# Altium PCB CH32F207&V307V-R3-2v0.PcbDoc (part 2 of 2)
Units mil, origin at the board's own origin, x right, y up, seen from the top; angles counter-clockwise.
Board outline 2913.39 x 3937.01 mil, 2 copper layers (Top Layer, Bottom Layer); 74 components, 114 nets, 419 pads, 786 vias.
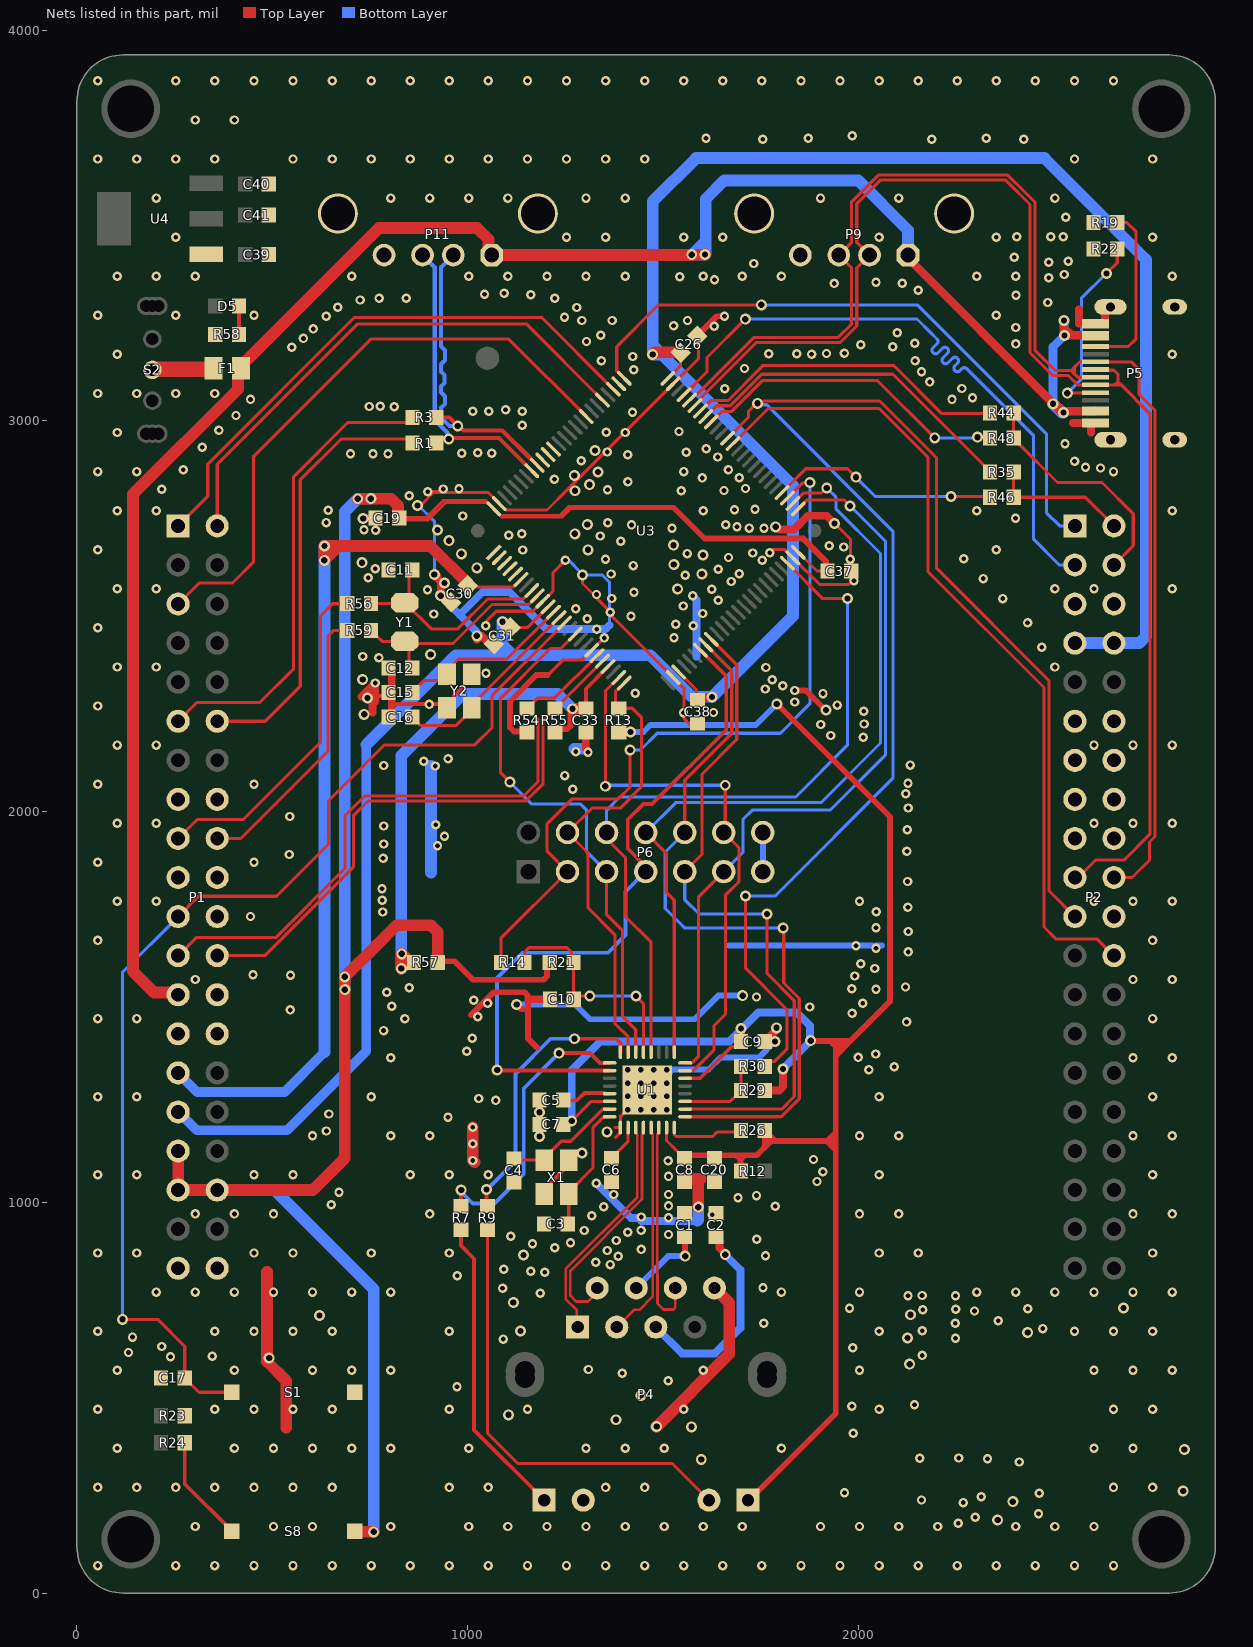
[diagram p2: the nets of this part, all layers, seen from the top]

## Via types
v1: diameter 24, hole 12, Top Layer to Bottom Layer, tented both sides, 649 vias
v2: diameter 28, hole 16, Top Layer to Bottom Layer, tented both sides, 129 vias
v3: diameter 20, hole 14, Top Layer to Bottom Layer, tented both sides, 8 vias

## Nets (pads, with @x,y where several pads share a name; then routed paths per layer and width w, separated by ;. In a path a pad name is that pad's centre, name@x,y a point inside that pad or via, vN(x,y) a via of type N, cw(c..) or ccw(c..) an arc to the next point about the centre after c; other vN are vias at no path point) (continued)
GND: C1.1 C2.1 C3.1 C4.1 C5.1 C6.1 C7.1 C8.1 C9.1 C10.1 C11.1 C12.1 C15.1 C16.1 C17.1 C19.2 C20.1 C26.1 C30.1 C31.2 C33.2 C37.1 C38.1 C39.2 C40.2 C41.2 P1.15 P1.16 P1.19 P1.20 P1.22 P1.26 P1.27 P1.28 P1.39 P1.40 P2.5 P2.6 P2.11 P2.12 P2.13 P2.14 P2.15 P2.16 P2.17 P2.18 P2.22 P4.8 P4.10 P5.0 P5.A1 P5.B1 P6.13 P6.14 P9.0 P9.4 P11.0 P11.4 R19.2 R22.2 R23.2 R54.1 R58.1 S1.1 U1.0 U1.1 U3.10 U3.19 U3.27 U3.49 U3.74 U3.99 U4.1 X1.2 X1.4 Y2.2 Y2.4 | length 9052.2
  Top Layer w8: v2(871.79,2783.87) 879.92,2783.87 912.86,2816.81 946.5,2816.81 ; v1(897.63,2819.23) 930.58,2819.23 v1(937.33,2825.98) 946.5,2816.81 ; 1049.19,2488.87 1073.34,2513.02 1166.83,2513.02 U3.10@1192.22,2538.42 1192.49,2538.42 1218.52,2564.44 1218.52,2611.77 v1(1250.36,2643.6) ; 1205.11,2349.62 1243.45,2387.96 1292.31,2387.96 U3.19@1317.5,2413.14 v1@1341.82,2437.46 ; v2(1294.07,2605.56) 1294.07,2584.06 1326.07,2552.07 1329.7,2552.07 1333.11,2548.65 1333.11,2543.66 1365.12,2511.65 v1(1365.12,2510.84) ; v1@1368.18,2503.45 1368.18,2501.66 U3.27@1526.29,2343.55 1553.46,2316.37 1553.46,2239.01 1569.2,2223.28 C38.1@1594.99,2223.28 ; 1377.69,1191.56 U1.1@1391.13,1191.56 ; 1379.23,1166.65 1391.13,1178.56 U1.1@1391.13,1191.56 ; U1.0@1460.02,1288.04 1391.13,1219.15 U1.1@1391.13,1191.56 ; C26.1@1590.81,3214.89 1588.61,3212.69 1588.61,3196.86 1590.81,3194.66 1590.81,3159.71 U3.74@1526.29,3095.19 1364.7,2933.6 1256.28,2825.18 1203.13,2772.03 1098.07,2772.03 1081.14,2788.97 U3.99@1080.87,2788.97 1053.03,2816.81 946.5,2816.81 ; v1@1781.77,2670.87 1811.42,2670.87 U3.49@1832.52,2649.77 1900.57,2581.72 1975.15,2581.72 1979.84,2586.41 1979.84,2696.96 v2(1939.28,2737.52)
  Top Layer w10: 763.65,2295.95 763.83,2295.77 C15.1@805.65,2295.77 ; 805.65,2275.22 937.86,2275.22 Y2.2@947.43,2265.64 ; Y2.2@953.93,2277.07 965.07,2288.2 965.07,2297.16 992.79,2324.88 992.79,2333.7 Y2.4@1015.13,2356.04 ; X1.2@1195.81,1021.52 1213.45,1039.16 1213.45,1051.05 X1.4@1259.17,1096.78
  Top Layer w15: 1008.28,1479.25 1066.73,1537.7 1146.14,1537.7 1153.52,1530.32 1153.52,1515.31 1155.47,1513.37 ; v2(1125.64,1506.56) 1137.69,1494.5 1154.93,1494.5 ; R54.1@1151.71,2203.39 1149.86,2205.24 1118.94,2205.24 1108.4,2215.79 1108.4,2282.23 1175.79,2349.62 1205.11,2349.62 ; 1154.93,1512.83 1154.93,1494.5 ; 1178.23,1395.81 1154.93,1419.11 1154.93,1494.5 ; C26.1@1587.91,3217.79 1638.04,3267.92 v1(1657.57,3267.92) ; v1(1837.58,2310.24) 1865.73,2310.24 1915.89,2260.08 v2(1917.56,2260.08)
  Top Layer w20: 728.37,2294.25 v1(763.65,2329.53) 763.65,2295.95 763.65,2282.1 756.34,2274.79 756.34,2254.28 ; v2(732.81,2750.69) 733.22,2751.1 764.01,2751.1 C19.2@764.42,2751.51 ; C16.1@805.65,2259.28 805.65,2275.22 805.65,2295.77 C12.1@805.65,2367.29 ; v2@922.84,2602.41 920.67,2600.24 920.67,2598.71 931.08,2588.3 v2(931.08,2552.96) 942.37,2552.96 958.04,2537.29 C30.1@958.04,2536.05 ; v2(1023.58,2450.1) 1023.58,2440.91 1024.25,2440.24 1034.86,2450.85 1056.71,2429 C31.2@1066.98,2429 ; 1166.48,1519.95 C10.1@1210.77,1519.95 ; C33.2@1302.56,2203.39 1302.56,2161.93 v1@1305.67,2158.82 ; C9.1@1760.6,1411.72 1760.6,1412.71 1768.9,1421.01 1769.89,1421.01 1790.67,1441.8 v2(1790.67,1446.77) ; v2(1788.61,2729.1) 1790.78,2729.1 1797.76,2722.11 1835.38,2722.11 1870.67,2757.4 1919.4,2757.4 v2(1939.28,2737.52) ; 2549.01,2994.92 P5.A1@2595.58,2994.92 ; 2564.59,3286.19 2564.59,3248.85 P5.B1@2607.08,3248.85 2629.71,3248.85 2631.53,3250.66 2631.53,3283.02 2640.47,3291.96 P5.0@2645.27,3291.96 ; 2595.58,2970.49 P5.A1@2595.58,2994.92 ; P5.A1@2607.08,2994.92 P5.A1@2595.58,2994.92
  Top Layer w30: 486.66,822.84 486.66,592.85 535.99,543.52 535.99,423.35 ; v1(1013.13,1192.39) v1(1013.13,1149.81) v1(1013.13,1107.24) v1@1017.7,1102.68 ; v2(1483.88,426.33) 1669.75,612.19 1669.75,742.85 P4.8@1631.72,780.88 ; C8.1@1554.17,1059.9 1596.54,1059.9 1590.61,1053.97 v2(1590.61,987.87)
  Bottom Layer w8: v2(871.79,2783.87) 874.19,2783.87 914.82,2743.23 v2(914.82,2607.28) ; v1(1250.36,2643.6) 1258.68,2643.6 v2@1290.29,2611.99 ; v2(1294.07,2605.56) 1345.4,2605.56 1362.9,2588.06 1362.9,2477.28
  Bottom Layer w15: v2(1125.64,1506.56) 1275.43,1506.56 1313.19,1468.8 1581.35,1468.8 1641.71,1529.16 v2(1704.12,1529.16) ; 1514.26,1329.2 1525.08,1340.01 1616.45,1340.01 1647.77,1371.33 1746.35,1371.33 v2(1786.74,1411.72) ; 1669.06,1657.14 2036.07,1657.14 2041.01,1652.2 2042.73,1652.2 v1@2045.16,1654.64 ; P6.13@1755.72,1846.68 P6.14@1755.72,1946.68 ; v1@2045.16,1657.14 2060.76,1657.14
  Bottom Layer w20: v2@926.94,2556.61 979.82,2503.73 ; v2(1023.58,2450.1) 1023.58,2459.96 979.82,2503.73 ; v1(1329.67,1048.76) 1418.6,959.84 1440.58,959.84 1442.58,961.85 1443.35,961.85 v1@1444.43,960.76 ; 1362.9,2477.28 1353.26,2467.65 1201.38,2467.65 1106.42,2562.61 1038.7,2562.61 979.82,2503.73 ; v1@1444.43,952.76 1588.27,952.76 ; v1(1576,2552.62) 1576,2551.54 1585.73,2541.8 1585.73,2396.63
  Bottom Layer w30: 906.22,1844.26 v1@906.22,2116.82 ; v1@1273.13,2160.92 1295.46,2160.92 ; U1.0@1476.73,1271.34 U1.0@1479.94,1274.55 ; v2@1483.59,426.03 v2(1483.88,426.33) ; 1588.27,952.76 1590.61,955.09 v2(1590.61,987.87)
  other v1: 53.19,70.49 253.19,70.49 353.19,70.49 453.19,70.49 553.19,70.49 653.19,70.49 753.19,70.49 853.19,70.49 953.19,70.49 1053.19,70.49 1153.19,70.49 1253.19,70.49 1353.19,70.49 1453.19,70.49 1553.19,70.49 1653.19,70.49 1753.19,70.49 1853.19,70.49 1953.19,70.49 2053.19,70.49 2153.19,70.49 2253.19,70.49 2353.19,70.49 2453.19,70.49 2553.19,70.49 2653.19,70.49 303.19,170.49 503.19,170.49 603.19,170.49 803.19,170.49 1003.19,170.49 1103.19,170.49 1203.19,170.49 1303.19,170.49 1403.19,170.49 1503.19,170.49 1603.19,170.49 1703.19,170.49 1903.19,170.49 2003.19,170.49 2103.19,170.49 2203.19,170.49 2403.19,170.49 2503.19,170.49 2603.19,170.49 2255.97,178.62 2299.6,194.55 2461.09,203.37 2268.5,231.68 2161.76,238.2 2314.52,246.92 2463.23,255.75 1964.55,257.06 53.19,270.49 153.19,270.49 253.19,270.49 353.19,270.49 453.19,270.49 553.19,270.49 653.19,270.49 953.19,270.49 1053.19,270.49 1353.19,270.49 1453.19,270.49 2653.19,270.49 2753.19,270.49 2411.64,335.63 2156.91,344.8 2330.8,344.05 2257.25,345.73 103.19,370.49 403.19,370.49 503.19,370.49 603.19,370.49 703.19,370.49 803.19,370.49 1003.19,370.49 1303.19,370.49 1403.19,370.49 1503.19,370.49 1803.19,370.49 2603.19,370.49 2703.19,370.49 1986.85,409.14 53.19,470.49 353.19,470.49 453.19,470.49 553.19,470.49 653.19,470.49 953.19,470.49 1153.19,470.49 1553.19,470.49 2053.19,470.49 2653.19,470.49 2753.19,470.49 1983.62,478.52 2143.72,481.8 972.81,528.2 1513.17,543.54 1395.68,562.94 103.19,570.49 403.19,570.49 603.19,570.49 703.19,570.49 803.19,570.49 1603.19,570.49 2003.19,570.49 2603.19,570.49 2703.19,570.49 2803.19,570.49 1309.23,572.36 239.64,605.15 346.81,606.34 2163.72,608.33 132.05,615.81 1985.41,628.3 217.08,631.35 1091.21,650.21 2248.83,652.26 142.46,655.28 53.19,670.49 353.19,670.49 453.19,670.49 553.19,670.49 653.19,670.49 953.19,670.49 2053.19,670.49 2553.19,670.49 2653.19,670.49 2753.19,670.49 2163.72,671.6 2472.02,677.09 2248.16,690.53 1757.93,691.06 2358.47,696.71 2297.32,721.91 2165.18,725.48 2249.35,726.47 1977.37,728.71 2433.43,728.1 2127.2,761.19 2163.2,761.62 2248.85,761.13 1185.61,767.28 203.19,770.49 303.19,770.49 403.19,770.49 503.19,770.49 603.19,770.49 703.19,770.49 803.19,770.49 1803.19,770.49 2003.19,770.49 2303.19,770.49 2403.19,770.49 2503.19,770.49 2603.19,770.49 2703.19,770.49 2803.19,770.49 1089.51,780.38 1756.08,781.95 973.86,812.61 1197.31,821.43 1161.46,823.63 1092.16,828.75 1365.08,840.83 1328.22,846.92 1385.36,861.8 1762.58,863.27 53.19,870.49 153.19,870.49 453.19,870.49 553.19,870.49 753.19,870.49 953.19,870.49 2053.19,870.49 2153.19,870.49 2753.19,870.49 1357.3,877.01 1444.32,879.65 1222.87,883.73 1166.21,894.06 1263.46,896.92 1380.27,902.49 1739.81,905.55 1110.79,913.01 1514.14,917.92 1410.1,923.26 1298.86,928.02 1444.02,928.4 1514.14,960.52 1444.43,962.61 1317.78,965.52 1625.97,968.44 303.19,970.49 403.19,970.49 503.19,970.49 903.19,970.49 2003.19,970.49 2103.19,970.49 2703.19,970.49 2803.19,970.49 1348.63,988.71 1514.14,990.95 1787.52,990.13 651.19,994.32 1692.11,1011.81 1739.33,1017.46 1374.04,1020.14 1514.14,1020.34 670.88,1025.91 1894.43,1053.54 1514.14,1066.49 53.19,1070.49 153.19,1070.49 453.19,1070.49 553.19,1070.49 853.19,1070.49 953.19,1070.49 1053.19,1070.49 2053.19,1070.49 2753.19,1070.49 1909.45,1078.37 1513.14,1106.62 1885.23,1109.83 603.19,1170.49 803.19,1170.49 903.19,1170.49 2003.19,1170.49 2103.19,1170.49 2703.19,1170.49 2803.19,1170.49 638.69,1182.79 949.96,1217.92 645.08,1226.24 1072.24,1261.04 1028.56,1265.84 53.19,1270.49 153.19,1270.49 753.19,1270.49 2053.19,1270.49 2753.19,1270.49 2027.21,1339.4 2091.87,1347.48 803.19,1370.49 2703.19,1370.49 2803.19,1370.49 2000.2,1371.07 2044.44,1379.91 997.86,1387.13 1011.56,1420.1 785,1439.82 2123.54,1461.93 53.19,1470.49 153.19,1470.49 839.59,1470.12 2753.19,1470.49 1026.26,1475.07 1984.06,1483.95 546.15,1492.64 1875.53,1500.03 806.15,1502.42 2011.2,1509.79 1051.11,1510.07 1016.11,1517.68 1739.46,1525.84 793,1537.86 2045.16,1545.57 1983.2,1546.46 850.74,1549.01 2120.79,1551.38 303.19,1570.49 2703.19,1570.49 2803.19,1570.49 1990.6,1579.4 546.66,1581.34 450.9,1582.85 2041.87,1598.59 2006.35,1610.46 2127.83,1641.12 2045.16,1650.48 1994.02,1656.54 53.19,1670.49 2753.19,1670.49 2127.83,1693.24 2045.16,1702.94 444.28,1731.6 783.17,1743.38 2046.23,1744 2126.98,1755.61 103.19,1770.49 203.19,1770.49 2003.19,1770.49 2603.19,1770.49 2703.19,1770.49 2803.19,1770.49 781.68,1773.58 780.88,1802.68 2126.12,1821.4 53.19,1870.49 453.19,1870.49 783.67,1880.68 543.42,1890.33 2124.41,1899.15 922.86,1912.45 785.16,1917.18 940.96,1937.15 2125.27,1953.84 785.63,1963.53 918.48,1966.8 103.19,1970.49 203.19,1970.49 2603.19,1970.49 2703.19,1970.49 2803.19,1970.49 544.54,1987.6 2128.04,2009.37 2121.46,2045.58 1268.79,2057.08 53.19,2070.49 453.19,2070.49 2127.05,2072.45 1248.29,2092.43 917.13,2116.82 785.63,2118.38 2132.65,2119.32 887.78,2128.8 950.03,2135.14 1308.06,2151.76 1276.48,2153.87 103.19,2170.49 203.19,2170.49 2603.19,2170.49 2703.19,2170.49 2803.19,2170.49 2012.82,2190.29 1929.77,2194.96 1903.97,2223.21 2014.79,2224.44 1552.55,2253.47 1629.43,2253.95 2013.81,2256.88 53.19,2270.49 1945.99,2272.85 901.63,2274.55 1837.47,2280.65 1909.63,2302.34 1429.01,2303.11 1761.68,2313.91 1806.92,2322.2 1779.98,2337.81 1047.06,2354.49 1763.55,2368.93 103.19,2370.49 203.19,2370.49 2503.19,2370.49 773.08,2393.63 731.34,2397.08 2469.43,2421.25 1350.11,2444.72 1528.37,2445.09 1330.81,2467.08 53.19,2470.49 1046.78,2475.93 1577.88,2475.77 1532.99,2479.44 2433.24,2483.66 1306.38,2493.79 1418.07,2500.57 913.64,2506.14 1601.84,2507.42 1277.2,2519.28 1552.11,2526.4 1641.62,2540.87 1369.19,2545.61 2369.58,2545.44 1330.05,2556.04 1426,2561.33 897.35,2567.79 1624.58,2569.34 103.19,2570.49 203.19,2570.49 2503.19,2570.49 2603.19,2570.49 2803.19,2570.49 1674.63,2589.25 1988.86,2591.41 2319.65,2596.62 745.91,2598.67 1557.08,2605.07 1367.22,2608.23 1695.46,2608.89 1641.17,2620.44 763.98,2622.17 1424.26,2629.95 1753.92,2643.28 1353.09,2646.43 1979.49,2646.35 2269.73,2647.17 1667.73,2650.5 1562.32,2660.66 1730,2662.18 1773.53,2663.13 1141.51,2669.72 53.19,2670.49 2353.19,2670.49 1962.39,2677.51 1925.49,2680.49 1392.22,2692.05 1339.52,2705.63 1105.71,2707.17 1138.86,2711.09 764.51,2720.4 734.94,2721.5 1523,2725.44 1720.7,2725.87 1758.52,2725.46 1689.67,2729.44 1419.55,2734.02 1660.41,2734.44 1358.49,2739.47 638.21,2740.01 2402.39,2751.15 987.79,2756.67 103.19,2770.49 203.19,2770.49 1603.19,2770.49 2303.19,2770.49 2803.19,2770.49 643.06,2771.36 1683.07,2772.79 1735.65,2774.1 850.69,2808.53 1547.04,2821.42 1656.13,2822.08 1357.92,2824.03 217.1,2825.28 978.09,2826.22 1711.24,2827.35 1410.35,2844.42 1222.26,2851.26 1600.93,2854.28 1695.27,2855.04 53.19,2870.49 153.19,2870.49 1553.19,2870.49 2653.19,2870.49 1667.58,2874.92 271.94,2875.09 2619.77,2879.64 2581.39,2881.36 2553.55,2896.82 1290.59,2898.32 1640.6,2907.93 1409.69,2913.42 700.2,2916.09 758.02,2916.09 796.25,2916.09 985.41,2917.15 1061.79,2917.16 1025.8,2918.61 1357.22,2920.57 1559.53,2920 1611.14,2928.88 320.74,2932.94 2529.02,2941.78 103.19,2970.49 1403.19,2970.49 1354.68,2971.37 1541.13,2973.23 363.5,2976.2 1140.23,2988.97 407.26,3013.93 1422.18,3022.51 1054.52,3024.7 1012.87,3025.05 1139.7,3025.24 1097.23,3028.62 812.11,3036.82 748.29,3037.19 776.21,3037.91 444.49,3055.19 2239.84,3055.19 2292.15,3059.21 53.19,3070.49 153.19,3070.49 253.19,3070.49 353.19,3070.49 1658.5,3082.49 2265.21,3083.22 2183,3099.96 2161.87,3126.12 1425.53,3131.37 1708.71,3134.49 2145.34,3153.8 1342.53,3154.5 1422.48,3164.92 103.19,3170.49 1880.39,3170.94 2803.19,3170.49 1770.91,3172.03 1842.26,3172.43 1918.52,3172.8 1964.5,3173.18 549.84,3188.51 2087.87,3189.92 2006.36,3194.86 2403.2,3197.26 2144.7,3198.7 1304.42,3203.5 579.76,3211.33 1340.72,3219.83 2100.07,3226.04 605.12,3235.67 2402.6,3239.34 1631.65,3242.53 1527.16,3243.52 1292.63,3257.03 1369.76,3257.03 1562.9,3257.3 1248.16,3265.2 638.59,3268.13 53.19,3270.49 253.19,3270.49 453.19,3270.49 2353.19,3270.49 1279.02,3290.61 668,3291.45 2485.05,3303.16 724.8,3309.71 773.48,3314.27 843.18,3314.06 1223.34,3314.44 2403.46,3321.85 1161.66,3323.48 1043.23,3324.31 1093.4,3326.77 2153.56,3334.78 1938.74,3352.1 2112.65,3352.48 2045.23,3354.84 1631.97,3361.1 2487.33,3366.97 1543.04,3368.95 103.19,3370.49 203.19,3370.49 303.19,3370.49 703.19,3370.49 1003.19,3370.49 1103.19,3370.49 1203.19,3370.49 1303.19,3370.49 1403.19,3370.49 1603.19,3370.49 1703.19,3370.49 1803.19,3370.49 2303.19,3370.49 2403.19,3370.49 2803.19,3370.49 2527.27,3374.86 1732.67,3402.95 2487.57,3406.09 2537.41,3408.68 2399.06,3418.82 253.19,3470.49 1253.19,3470.49 1353.19,3470.49 1553.19,3470.49 1653.19,3470.49 2053.19,3470.49 2353.19,3470.49 2753.19,3470.49 2405.15,3471.92 2492.55,3471.92 2524.74,3471.23 2530.63,3521.81 203.19,3570.49 803.19,3570.49 903.19,3570.49 1003.19,3570.49 1103.19,3570.49 1303.19,3570.49 1403.19,3570.49 1903.19,3570.49 2103.19,3570.49 2503.19,3570.49 53.19,3670.49 153.19,3670.49 253.19,3670.49 353.19,3670.49 553.19,3670.49 653.19,3670.49 753.19,3670.49 853.19,3670.49 953.19,3670.49 1053.19,3670.49 1153.19,3670.49 1253.19,3670.49 1353.19,3670.49 1453.19,3670.49 2553.19,3670.49 2753.19,3670.49 1755.05,3721.46 2188.31,3721.46 2423.65,3721.46 1610.22,3723.88 1872.11,3723.88 2327.1,3723.88 1984.35,3729.91 303.19,3770.49 403.19,3770.49 53.19,3870.49 253.19,3870.49 353.19,3870.49 453.19,3870.49 553.19,3870.49 653.19,3870.49 753.19,3870.49 853.19,3870.49 953.19,3870.49 1053.19,3870.49 1153.19,3870.49 1253.19,3870.49 1353.19,3870.49 1453.19,3870.49 1553.19,3870.49 1653.19,3870.49 1753.19,3870.49 1853.19,3870.49 1953.19,3870.49 2053.19,3870.49 2153.19,3870.49 2253.19,3870.49 2353.19,3870.49 2453.19,3870.49 2553.19,3870.49 2653.19,3870.49
  other v2: 2356.63,186.82 2395.47,234.05 2831.43,261.4 1598.06,341.77 2834.52,367.32 1572.84,425.63 1379.57,443.75 1104.86,456.35 1444,505.48 2131.5,586.01 492.24,602.04 2126.18,653.14 2433.43,666.81 1135.69,670.82 621.14,710.78 2133.59,712.46 2678.56,729.62 1117.04,743.75 1143.14,865.59 1292.81,1126.64 1184.33,1168.6 1356.76,1180.61 1184.33,1230.81 735.24,2249.29 743.69,2290.7 731.46,2338.49 905.54,2402.47 1537.67,2569.67 940.7,2585.44 1599.47,2608.59 1023.69,2624.2 1527.93,2632.87 729.46,2637.47 1602.19,2656.74 983.9,2660.11 1308.23,2670.33 1526.81,2682.12 952.35,2693.6 1274.39,2711.16 922.74,2721.26 1306.42,2735.04 1274.91,2821.4 1311.94,2836.88 1273.07,2860.46 1334,2869.73 1326.29,2924.4
  other v3: 1443.32,1236.93 1476.73,1236.93 1409.91,1271.34 1510.14,1271.34 1409.91,1304.75 1510.14,1304.75 1443.32,1339.15 1476.73,1339.15
LCD_RST: U3.77
MDI_RX_N: P4.6 U1.6 | length 556.3
  Top Layer w7: U1.6@1489.55,1191.56 1489.55,1178.01 1485.71,1174.17 1485.71,1032.47 1485.69,816.61 1485.83,816.47 1485.83,741 1500.97,725.86 1526.45,725.86 1531.72,731.13 P4.6@1531.72,780.88
MDI_RX_P: P4.3 U1.5 | length 558.3
  Top Layer w7: P4.3@1381.72,680.88 1425.95,725.12 1439.54,725.12 1473.56,759.13 1473.56,815.41 1473.69,815.54 1473.69,1037.44 1473.71,1174.17 1469.87,1178.01 U1.5@1469.87,1191.56
MDI_TX_N: P4.2 U1.4 | length 603.2
  Top Layer w7: P4.2@1331.72,780.88 1331.72,770.24 1307.97,746.49 1277.77,746.49 1262.99,761.27 1262.99,824.86 1446.34,1008.21 1446.34,1174.17 1450.18,1178.01 U1.4@1450.18,1191.56
MDI_TX_P: P4.1 U1.3 | length 600.9
  Top Layer w7: P4.1@1281.72,680.88 1279.46,683.14 1279.46,724.44 1250.99,752.91 1250.99,829.83 1434.34,1013.18 1434.34,1174.17 1430.5,1178.01 U1.3@1430.5,1191.56
NetC1_2: C1.2 P4.4 | length 208.6
  Top Layer w15: C1.2@1555.17,911.35 1556.06,910.47 1556.06,863.39 v2(1556.94,862.5)
  Bottom Layer w15: P4.4@1431.72,780.88 1513.34,862.5 v2(1556.94,862.5)
NetC2_2: C2.2 P4.5 | length 530.4
  Top Layer w20: C2.2@1635.7,911.35 1636.68,911.35 1644.99,903.04 1644.99,882.99 1659.5,868.48 v2(1659.5,866.31)
  Bottom Layer w20: P4.5@1481.72,680.88 1549.14,613.46 1632.82,613.46 1698.1,678.74 1698.1,827.71 v2(1659.5,866.31)
NetC5_2: C5.2 U1.29 | length 127
  Top Layer w10: C5.2@1244.86,1261.57 1280.76,1261.57 1299.08,1279.89 1349.84,1279.89 1351.54,1278.2 U1.29@1363.54,1278.2
NetC6_2: C6.2 U1.2 | length 96.3
  Top Layer w8: C6.2@1368.09,1113.53 1369.07,1113.53 1383.38,1127.84 1383.38,1128.82 1410.81,1156.26 U1.2@1410.81,1191.56
NetD5_K: D5.K R58.2 | length 72.7
  Top Layer w10: R58.2@415.08,3221.37 D5.K@415.08,3294.04
NetF1_2: F1.2 S2.1 | length 158.8
  Top Layer w40: S2.1@193.1,3130.85 194.49,3132.23 349.69,3132.23 F1.2@350.82,3133.37
NetP2_2: P2.2 R35.1 R46.1 | length 338.2
  Top Layer w8: R46.1@2397.58,2804.8 R35.1@2397.58,2869.04 ; R46.1@2410.67,2804.7 2581.1,2804.7 P2.2@2654.28,2731.51
NetP2_4: P2.4 R44.1 R48.1 | length 603.4
  Top Layer w8: R44.1@2397.58,3020.84 2397.58,2954.94 2411.88,2940.63 2510,2842.51 2623.79,2842.51 2703.84,2762.46 2703.84,2681.07 P2.4@2654.28,2631.51
NetP4_9: P4.9 R7.1 | length 780.5
  Top Layer w10: R7.1@983.15,930.15 983.15,889.37 1016.77,855.75 1016.77,417.21 P4.9@1196.09,237.89
NetP4_11: P4.11 R9.1 | length 1158.6
  Top Layer w8: R9.1@1050.89,930.15 1050.89,409.43 1128.98,331.34 1524.29,331.34 P4.11@1617.74,237.89
NetP5_A5: P5.A5 R22.1 | length 495.2
  Top Layer w8: v2(2534.98,3071.07) 2535.94,3072.03 2606.44,3072.03 P5.A5@2607.08,3072.67 ; v2(2634.98,3377.43) 2662.62,3405.06 R22.1@2662.62,3440.28
  Bottom Layer w8: v2(2534.98,3071.07) 2570.98,3107.07 2570.98,3314.08 2634.33,3377.43 v2(2634.98,3377.43)
NetP5_B5: P5.B5 R19.1 | length 444.1
  Top Layer w8: P5.B5@2607.08,3190.78 2691.11,3190.78 2711.07,3210.74 2711.07,3484.36 2687.45,3507.98 R19.1@2662.62,3507.98
NetR24_2: R24.2 S8.2 | length 267.8
  Top Layer w10: R24.2@276.12,376.67 276.12,279.32 S8.2@396.62,158.82
NetR26_2: R26.2 U1.8 | length 197.4
  Top Layer w8: U1.8@1528.92,1191.56 1529.11,1191.36 1529.11,1173.62 1534.11,1168.62 1627.32,1168.62 1639.28,1180.58 1640.47,1180.58 1696.43,1180.58 R26.2@1699.97,1184.11
NRST: C17.2 P1.21 S1.2 U3.14 | length 2908
  Top Layer w8: v2(116.92,700.64) 206.81,700.64 276.12,631.32 C17.2@276.12,550.68 276.12,549.7 290.42,535.39 291.41,535.39 312.62,514.18 S1.2@396.62,514.18 ; P1.21@259.1,1731.51 311.02,1783.43 510.78,1783.43 643.83,1916.48 643.83,2027.84 787.15,2171.16 1018.69,2171.16 1062.92,2215.4 1062.92,2297.76 U3.14@1247.9,2482.74
  Bottom Layer w8: v2(116.92,700.64) 116.92,1589.33 P1.21@259.1,1731.51
PA8: R48.2 U3.67 | length 822.7
  Top Layer w8: U3.67@1623.73,2997.76 1650.38,3024.41 1655.01,3024.41 1655.29,3024.7 1675.98,3024.7 1754.55,3103.27 2049.14,3103.27 v2(2195.6,2956.81) ; v2(2305.15,2958.49) 2334.38,2958.49 R48.2@2336.95,2955.92 ; R48.2@2345.95,2957.75 R48.2@2347.63,2956.07
  Bottom Layer w8: v2(2195.6,2956.81) v2@2306.83,2956.81
PB6: P1.11 R3.2 | length 1212.6
  Top Layer w8: P1.11@259.1,2231.51 307.03,2279.44 468.47,2279.44 554.61,2365.57 554.61,2857.65 693.1,2996.14 R3.2@866.74,2996.14
PB7: P1.12 R1.2 | length 1111.4
  Top Layer w8: P1.12@359.1,2231.51 481.87,2231.51 571.6,2321.23 571.6,2849.25 676.24,2953.9 R1.2@861.95,2953.9
PC6: P2.24 U3.63 | length 2122.6
  Top Layer w8: U3.63@1679.4,2942.08 1769.43,3032.11 2053.23,3032.11 2178.5,2906.83 2178.5,2614.51 2475.15,2317.86 2475.15,1704.98 2506.29,1673.84 2611.96,1673.84 P2.24@2654.28,1631.51
PC14: P1.17 R56.2 | length 871.4
  Top Layer w8: P1.17@259.1,1931.51 307.62,1980.03 425.72,1980.03 623.56,2177.88 623.56,2500.94 654.77,2532.14 691.86,2532.14 R56.2@692.29,2532.57
PC15: P1.18 R59.2 | length 726.2
  Top Layer w8: P1.18@359.1,1931.51 419.11,1931.51 642.66,2155.06 642.66,2449.35 657.48,2464.16 R59.2@692.29,2464.16
PE2: U3.1
PE3: U3.2
PE4: U3.3
PE5: U3.4
PE6: U3.5
PHY_INTB: R29.1 R30.1 U1.11 | length 217.3
  Top Layer w8: U1.11@1556.51,1258.52 1671.96,1258.52 1684.68,1271.24 1685.66,1271.24 1699.97,1285.54 R30.1@1699.97,1348.23
PHY_LED0: R9.2 U1.24 | length 706.9
  Top Layer w10: v2(1048.36,1032.77) 1048.36,999.36 1053.92,993.81 R9.2@1050.89,990.78 ; v2(1273.44,1418.84) 1380.2,1418.84 1391.13,1407.91 U1.24@1391.13,1384.53
  Bottom Layer w10: v2(1048.36,1032.77) 1049.42,1032.77 1122.16,1105.52 1122.16,1328.71 1212.28,1418.84 v2(1273.44,1418.84)
PHY_LED1: R7.2 U1.25 | length 736.6
  Top Layer w10: R7.2@983.15,990.78 983.56,991.19 v2(983.56,1032.05) ; v2(1234.25,1382.03) 1313.52,1382.03 1338.61,1356.94 U1.25@1363.54,1356.94
  Bottom Layer w10: v2(983.56,1032.05) 983.56,1027.18 1013.26,997.48 1068.77,997.48 1143.66,1072.37 1143.66,1291.44 v2(1234.25,1382.03)
PHY_reset: P6.3 R14.2 U3.53 | length 1942.5
  Top Layer w8: R14.2@1085.25,1614.12 1085.25,1676.21 P6.3@1255.72,1846.68 1203.67,1898.73 1203.67,1968.71 1267.66,2032.7 1385.58,2032.7 1416,2063.12 v2(1416,2158) ; U3.53@1818.6,2802.89 1856.77,2841.06 1866.68,2841.06 1872.09,2846.47 v2@1872.09,2848.86
  Bottom Layer w8: v2(1416,2158) 1442.65,2158 1485.57,2200.92 1800.79,2200.92 1875.91,2276.04 v2(1875.91,2842.69)
PHYRST: C10.2 R14.1 R21.1 U1.21 | length 592.6
  Top Layer w8: R14.1@1145.88,1614.12 1145.99,1614.24 1145.99,1640.73 1156.96,1651.7 1254.26,1651.7 1265.23,1640.73 1265.23,1620.29 1271.4,1614.12 1271.4,1524.51 C10.2@1271.4,1520.93 ; C10.2@1271.4,1519.95 C10.2@1271.4,1520.93 ; v2(1312.59,1528.33) 1278.79,1528.33 C10.2@1271.4,1520.93 ; v2(1430.83,1528.21) 1450.18,1508.86 U1.21@1450.18,1384.53
  Bottom Layer w8: v2(1312.59,1528.33) 1430.72,1528.33 v2(1430.83,1528.21)
PVIN: F1.1 P1.25 P5.A4 P5.B4 P9.1 P11.1 | length 5184.3
  Top Layer w22: P9.1@2127.17,3424.57 2127.17,3416.83 2498.34,3045.66 v2(2498.34,3044.03) v2@2499.49,3042.88 ; v2(2525.14,3021.93) v2@2523.52,3021.93 ; v2(2526.15,3257.48) 2526.15,3238.1 ; 2555.88,3219.15 2545.1,3219.15 ; P5.A4@2606.27,3026.24 P5.A4@2607.08,3025.43 2523.94,3025.43 v2@2520.44,3021.93 ; P5.B4@2607.08,3218.34 2606.27,3219.15 2545.1,3219.15 ; v2@2499.49,3042.88 v2@2520.44,3021.93 ; v2@2499.49,3042.88 2502.57,3042.88 2521.98,3023.47 v2@2523.52,3021.93 ; v2@2520.44,3021.93 v2@2523.52,3021.93 ; 2526.15,3238.1 2545.1,3219.15 ; 2526.15,3238.1 2526.15,3220.04 v2(2527.46,3218.73) 2527.89,3219.15 2545.1,3219.15
  Top Layer w30: P1.25@259.1,1531.51 253.54,1537.07 197.78,1537.07 143.48,1591.38 143.48,2812.42 412.29,3081.24 412.29,3127.53 F1.1@420.13,3135.37 420.13,3141.47 772.39,3493.73 1024.95,3493.73 1053.52,3465.17 1053.52,3432.86 P11.1@1061.8,3424.57 1572.76,3424.57 v2(1573.75,3425.56) 1607.2,3425.56 v2(1607.74,3426.09)
  Bottom Layer w22: v2(2498.34,3044.03) 2498.34,3189.61 v2(2527.46,3218.73) 2526.8,3219.38 2526.8,3256.82 v2(2526.15,3257.48)
  Bottom Layer w30: v2(1573.75,3425.56) v2@1574.27,3425.56 ; P9.1@2127.17,3418.86 P9.1@2127.17,3424.57 2127.17,3488.2 1999.59,3615.79 1656.8,3615.79 1609.24,3568.23 1609.24,3460.52 ; v2(2498.34,3044.03) 2520.44,3021.93 v2(2525.14,3021.93) ; v2@1574.27,3425.56 1607.2,3425.56 v2(1607.74,3426.09) 1609.24,3427.59 1609.24,3460.52 ; v2@1574.27,3425.56 1609.24,3460.52
RMII_CRS_DV: P6.7 U1.26 U3.32 | length 1828.9
  Top Layer w10: v2(1075.64,1338.83) 1077.21,1337.26 U1.26@1363.54,1337.26 ; P6.7@1455.72,1846.68 1455.72,1860.02 1410.01,1905.73 1410.01,1979.51 1449.78,2019.27 1471.74,2019.27 1662.04,2209.57 1662.04,2346.99 U3.32@1595.89,2413.14
  Bottom Layer w10: v2(1075.64,1338.83) 1075.64,1574.63 1140.09,1639.08 1358.87,1639.08 1404.21,1684.42 1404.21,1795.17 P6.7@1455.72,1846.68 P6.7@1467.64,1858.6
RMII_INTB: P2.21 R30.2 U3.64 | length 4092.3
  Top Layer w8: U3.64@1665.48,2956 1719.01,3009.53 1719.01,3025.06 1739.2,3045.25 v2(1741.91,3045.25) 1745.73,3049.07 1754.48,3049.07 1756.59,3051.19 2054.47,3051.19 2200.45,2905.2 2200.45,2622.82 2488.15,2335.12 2488.15,1797.64 P2.21@2554.28,1731.51 ; v2(1710.99,1784.18) 1710.99,1600.15 1817.25,1493.88 1817.25,1391.97 1786.22,1360.93 1773.31,1360.93 R30.2@1760.6,1348.23
  Bottom Layer w8: v2(1710.99,1784.18) 1787.01,1784.18 2088.6,2085.77 2088.6,2718.11 1765.29,3041.42 1745.73,3041.42 v2(1741.91,3045.25)
RMII_MDC: P6.5 U1.22 U3.16 | length 1381.6
  Top Layer w8: v2(1108.17,2075.91) 1084.57,2099.51 1084.57,2290.66 1211.72,2417.81 1238.65,2417.81 U3.16@1275.74,2454.9 ; P6.5@1355.72,1846.68 1355.72,1736.19 1396.86,1695.04 1396.86,1475.44 1430.5,1441.8 U1.22@1430.5,1384.53
  Bottom Layer w8: v2(1108.17,2075.91) 1164.64,2019.44 1289.23,2019.44 1304.59,2004.08 1304.59,1897.81 P6.5@1355.72,1846.68
RMII_MDIO: P6.4 R13.2 U1.23 U3.25 | length 1192.2
  Top Layer w8: U3.25@1401.02,2329.63 1401.02,2329.36 1378.21,2306.56 1378.21,2265.38 1378.9,2264.7 1421.64,2264.7 1444.87,2241.48 1444.87,2063.46 1390.63,2009.22 1318.26,2009.22 P6.4@1255.72,1946.68 1307.99,1894.41 1307.99,1753.81 1377.06,1684.74 1377.06,1457.86 1410.81,1424.12 U1.23@1410.81,1384.53
RMII_REF_CLK: P6.12 U1.15 U3.24 | length 1418.7
  Top Layer w8: v2(1352.63,2065.13) 1352.63,2308.81 1387.1,2343.28 U3.24@1387.1,2343.55 ; U1.15@1556.51,1337.26 1577.88,1337.26 1630.89,1390.26 1630.89,1452.77 1659.98,1481.86 1659.98,1575.05 1659.87,1575.16 1659.87,1786.22 1694.72,1821.07 1694.72,1907.68 P6.12@1655.72,1946.68 1659.65,1950.61 1659.44,1950.81 v2(1659.44,2067.71)
  Bottom Layer w8: v2(1352.63,2065.13) 1355.21,2067.71 v2(1659.44,2067.71)
RMII_RXD0: P6.10 U1.9 U3.33 | length 1870
  Top Layer w8: P6.10@1555.72,1946.68 1555.72,2080.43 1676.04,2200.76 1676.04,2360.83 U3.33@1609.81,2427.06 ; U1.9@1556.51,1219.15 1802.6,1219.15 1848.97,1265.51 1848.97,1521.85 1809.28,1561.53 v2@1809.28,1712.15
  Bottom Layer w8: P6.10@1555.72,1946.68 1505.9,1896.86 1505.9,1752.29 1555.93,1702.25 v2(1807.76,1702.25)
RMII_RXD1: P6.9 U1.10 U3.34 | length 1763
  Top Layer w8: P6.9@1555.72,1846.68 1599.9,1890.87 1599.9,2096.04 1689.04,2185.18 1689.04,2375.67 U3.34@1623.73,2440.98 ; U1.10@1556.51,1238.83 1803.9,1238.83 1835.97,1270.9 1835.97,1516.46 1766.52,1585.91 v2(1766.52,1737.99)
  Bottom Layer w8: P6.9@1555.72,1846.68 1555.72,1775.05 1592.77,1737.99 v2(1766.52,1737.99)
RMII_TXD0: P6.11 U1.16 U3.51 | length 1951.8
  Top Layer w8: U1.16@1556.51,1356.94 1556.7,1357.13 1574.6,1357.13 1591.41,1373.94 1591.41,1782.38 P6.11@1655.72,1846.68 ; U3.51@1846.44,2775.05 1869.43,2798.04 1876.77,2798.04 1963.47,2798.04 v2(1979.04,2782.47)
  Bottom Layer w8: P6.11@1655.72,1846.68 1704.64,1895.61 1704.64,1980.02 1729.39,2004.76 1928.9,2004.76 2069.91,2145.77 2069.91,2691.61 v2(1979.04,2782.47)
RMII_TXD1: P6.8 U1.17 U3.52 | length 2101.5
  Top Layer w8: P6.8@1455.72,1946.68 1508.4,1894 1508.4,1794.18 1528.92,1773.66 U1.17@1528.92,1384.53 ; U3.52@1832.52,2788.97 1858.93,2815.38 1904.62,2815.38 1917.74,2828.49 v2(1919.31,2828.49)
  Bottom Layer w8: P6.8@1455.72,1946.68 1532.38,2023.35 1904.53,2023.35 2056.91,2175.72 2056.91,2660.76 1943.25,2774.42 1943.25,2804.55 v2(1919.31,2828.49)
RMII_TXEN: P6.6 U1.20 U3.48 | length 1918
  Top Layer w8: P6.6@1355.72,1946.68 1355.72,1932.61 1369.43,1918.9 1369.43,1917 1404.25,1882.18 1404.25,1731.17 1469.87,1665.55 U1.20@1469.87,1384.53 ; U3.48@1818.6,2635.85 1909,2545.46 v2(1972.09,2545.46)
  Bottom Layer w8: P6.6@1355.72,1946.68 1355.72,2003.7 1389.76,2037.73 1839.71,2037.73 1972.09,2170.12 v2(1972.09,2545.46)
SDIO_CLK: P1.2 U3.80 | length 1373.5
  Top Layer w8: P1.2@359.1,2731.51 359.1,2888.84 718.91,3248.65 1150.12,3248.65 U3.80@1345.34,3053.44
SDIO_CMD: P1.5 U3.83 | length 1565.7
  Top Layer w8: P1.5@259.1,2531.51 312.91,2585.32 398.1,2585.32 452.4,2639.61 452.4,2909.86 752.18,3209.65 1105.61,3209.65 U3.83@1303.58,3011.68
SDIO_D2: P1.1 U3.78 | length 1458.6
  Top Layer w8: P1.1@259.1,2731.51 334.91,2807.32 334.91,2889.49 710.14,3264.72 856.52,3264.72 1189.73,3264.72 U3.78@1372.82,3081.63
SPI3_MISO: U3.90
SPI3_MOSI: U3.91
SPI3_SCK: U3.89
SWDCK: P2.1 U3.76 | length 1658.5
  Top Layer w8: U3.76@1401.02,3109.11 1401.02,3109.38 1381.83,3128.57 1381.83,3190.41 1488.73,3297.31 v2(1751.8,3297.31)
  Bottom Layer w8: v2(1751.8,3297.31) 2151.14,3297.31 2481.29,2967.16 2481.29,2765.47 2515.25,2731.51 P2.1@2554.28,2731.51
SWDIO: P2.3 U3.72 | length 1658.4
  Top Layer w8: U3.72@1554.13,3067.36 1612.66,3125.89 1612.66,3162.32 v2(1710.83,3260.49)
  Bottom Layer w8: v2(1710.83,3260.49) 1711.55,3261.21 2150.11,3261.21 2185.75,3225.57 2201.31,3210.01 cw(c2194.95,3203.65) 2201.31,3197.28 2191.32,3187.3 ccw(c2197.69,3180.93) 2204.05,3174.57 2215.53,3186.04 cw(c2221.89,3179.68) 2228.26,3186.04 cw(c2221.89,3179.68) 2228.26,3173.32 2216.78,3161.84 ccw(c2223.14,3155.48) 2216.78,3149.11 ccw(c2223.14,3155.48) 2229.51,3149.11 2240.98,3160.59 cw(c2247.35,3154.22) 2253.71,3160.59 cw(c2247.35,3154.22) 2253.71,3147.86 2247.35,3141.5 ccw(c2253.71,3135.13) 2247.35,3128.77 ccw(c2253.71,3135.13) 2260.08,3128.77 2264.95,3133.64 cw(c2271.31,3127.28) 2277.68,3133.64 2332.29,3079.03 2448.68,2962.64 2448.68,2697.29 2514.46,2631.51 P2.3@2554.28,2631.51
U1_RX/DVP_D1: R44.2 U3.69 | length 840.8
  Top Layer w8: U3.69@1595.89,3025.6 1622.43,3052.14 1666.65,3052.14 1756.8,3142.29 2090,3142.29 2212.75,3019.55 2335.65,3019.55 R44.2@2336.95,3020.84
U1_TX/DVP_D0: R35.2 U3.68 | length 876.5
  Top Layer w8: U3.68@1609.81,3011.68 1637.27,3039.14 1672.03,3039.14 1752.64,3119.75 2088.73,3119.75 R35.2@2338.19,2870.29
UART1_TX_2: R46.2 U3.54 | length 586.9
  Top Layer w8: U3.54@1804.68,2816.81 1865.56,2877.69 1972.3,2877.69 v2(1993.84,2856.15) ; v2(2237.17,2806.68) R46.2@2336.95,2806.68
  Bottom Layer w8: v2(1993.84,2856.15) 2043.31,2806.68 v2(2237.17,2806.68)
USB1D_n: P2.19 P5.A7 P5.B7 P9.2 U3.70 | length 3509
  Top Layer w8: U3.70@1581.97,3039.52 1596.65,3054.2 1596.65,3058.93 1738.76,3201.03 1953.95,3201.03 1995.88,3242.96 1995.88,3391.7 P9.2@2028.75,3424.57 1995.88,3457.44 1995.88,3556.05 2056.16,3616.33 2377.25,3616.33 2439.6,3553.98 2439.6,3174.83 2498.27,3116.17 2538,3116.17 2561.82,3092.36 P5.B7@2607.08,3092.36 2656.44,3092.36 ; P2.19@2562.98,1831.51 2607.77,1876.3 2680.69,1876.3 2746.24,1941.85 2746.24,3018.9 2672.78,3092.36 ; P5.A7@2602.46,3129.82 2654.59,3129.82 2664.61,3119.8 2664.61,3100.53 ; 2656.44,3092.36 2664.61,3100.53 ; 2656.44,3092.36 2664.61,3092.36 ; 2664.61,3092.36 2672.78,3092.36 ; 2664.61,3092.36 2664.61,3100.53 ; 2664.61,3100.53 2672.78,3092.36
USB1D_p: P2.20 P5.A6 P5.B6 P9.3 U3.71 | length 3520.8
  Top Layer w8: U3.71@1568.05,3053.44 1582.74,3068.12 1587.46,3068.12 1733.37,3214.03 1948.56,3214.03 1982.88,3248.34 1982.88,3391.7 P9.3@1950.01,3424.57 1982.88,3457.44 1982.88,3561.44 2050.77,3629.33 2382.63,3629.33 2427.02,3584.94 2452.6,3559.36 2452.6,3180.22 2503.65,3129.17 2544.35,3129.17 ; P5.B6@2599.08,3151.36 2698.86,3151.36 2718.78,3131.44 2718.78,3067.79 2759.24,3027.33 2759.24,1936.47 2745.18,1922.41 2745.18,1876.18 2700.51,1831.51 P2.20@2654.28,1831.51 ; P5.B6@2599.08,3151.41 2598.66,3150.99 2566.17,3150.99 2552.92,3137.74 ; P5.A6@2607.08,3112.04 2561.49,3112.04 2552.92,3120.61 ; 2544.35,3129.17 2552.92,3120.61 ; 2544.35,3129.17 2552.92,3137.74 ; 2552.92,3120.61 2552.92,3137.74
USB2D_n: P11.2 R3.1 U3.92 | length 814
  Top Layer w8: U3.92@1162.71,2902 U3.92@1178.3,2886.4
  Top Layer w11: R3.1@919.64,3008.94 952.81,3008.94 v2(974.75,2987) 978.49,2987 989.69,2975.8 1088.91,2975.8 U3.92@1162.71,2902
  Bottom Layer w11: P11.2@963.38,3424.57 932.01,3393.2 932.01,3223.74 932,3191.1 942.3,3180.8 942.3,3155.28 932,3144.98 932,3126.28 940.8,3117.47 940.8,3097.45 932,3088.65 932,3073.48 942.19,3063.29 942.19,3043.77 932,3033.58 932,3009.25 953.93,2987.31 974.43,2987.31 v2(974.75,2987)
USB2D_p: P11.3 R1.1 U3.93 | length 771.7
  Top Layer w8: 1146.02,2890.85 U3.93@1164.39,2872.48
  Top Layer w11: R1.1@927.37,2953.9 930.1,2956.63 951.75,2956.63 1080.24,2956.63 1146.02,2890.85
  Bottom Layer w11: P11.3@884.64,3424.57 916.01,3393.2 916.01,3230.36 916,3002.62 948.5,2970.12 948.5,2956.88 v2(951.75,2953.63)
VBAT: C30.2 P1.29 U3.6 | length 2427.5
  Top Layer w8: C30.2@1000.91,2578.93 1021.15,2578.93 1025.39,2574.68 1116.86,2574.68 1136.28,2594.1 U3.6@1136.55,2594.1
  Top Layer w30: 677.9,2680 669.86,2680 ; C30.2@1000.06,2584.15 904.21,2680 669.86,2680 ; v2@634,2644.14 669.86,2680 ; v2@634,2644.14 v2(633.34,2643.47) 633.34,2651.7 v2@634,2652.37 ; v2@634,2644.14 v2@634,2652.37 ; v2@634,2652.37 661.63,2680 ; v2@634,2652.37 v2(634,2680) 661.63,2680 ; 661.63,2680 669.86,2680
  Bottom Layer w25: P1.29@259.1,1331.51 307.8,1282.81 532,1282.81 634,1384.81
  Bottom Layer w30: 634,1384.81 v2(634,2680)
VCC182: C7.2 C8.2 C9.2 C20.2 P4.12 R12.1 R13.1 R26.1 R29.2 U1.7 U1.14 U1.30 | length 5063.6
  Top Layer w8: v2(1266.48,1208.19) 1316.81,1258.52 U1.30@1363.54,1258.52 ; U1.7@1509.24,1191.56 1509.24,1158.48 1532.88,1134.84 1539.88,1127.84 1547.19,1120.53 C8.2@1554.17,1120.53
  Top Layer w9: U1.14@1556.51,1317.57 1594.89,1317.57 1675.16,1397.84 1686.16,1397.84 C9.2@1699.97,1411.72 C9.2@1699.97,1411.72
  Top Layer w15: C8.2@1555.17,1113.53 1562.17,1120.53 1687.5,1120.53 ; R12.1@1699.97,1080.19 1698.44,1081.72 1698.44,1109.59 ; P4.12@1717.74,237.89 1739.77,259.92 1742.49,259.92 1942.17,459.59 1942.17,1135 ; v2(1791.4,2275.83) 1791.99,2275.83 2081.12,1986.7 2081.12,1514.58 1979.94,1413.4 ; v2(1878,1414) 1878.6,1413.4 1928.11,1413.4 ; 1687.5,1120.53 1698.44,1109.59 ; 1687.5,1120.53 1707.67,1120.53 ; 1698.44,1109.59 1707.67,1118.82 1707.67,1120.53 ; 1707.67,1120.53 1740.03,1120.53 1749.79,1130.29 1760.6,1141.1 ; 1760.6,1141.1 R26.1@1760.6,1183.13 ; 1760.6,1141.1 1776.26,1156.75 ; R26.1@1760.6,1183.13 R26.1@1760.6,1184.11 1771.4,1173.31 R26.1@1771.4,1172.32 ; R26.1@1760.6,1183.13 R26.1@1771.4,1172.32 ; R26.1@1771.4,1172.32 1771.4,1161.6 1776.26,1156.75 ; R26.1@1771.4,1172.32 1772.39,1172.32 1787.96,1156.75 ; 1776.26,1156.75 1787.96,1156.75 ; 1787.96,1156.75 1920.41,1156.75 ; 1920.41,1156.75 1942.17,1135 ; 1920.41,1156.75 1942.17,1156.75 ; 1920.41,1156.75 1942.17,1178.51 ; 1928.11,1413.4 1956.22,1413.4 ; 1928.11,1413.4 1942.17,1399.35 ; 1942.17,1135 1942.17,1156.75 ; 1942.17,1156.75 1942.17,1178.51 ; 1942.17,1178.51 1942.17,1375.63 ; 1942.17,1375.63 1942.17,1391.97 ; 1942.17,1375.63 1979.94,1413.4 ; 1942.17,1391.97 1942.17,1399.35 ; 1942.17,1391.97 1963.6,1413.4 ; 1942.17,1399.35 1956.22,1413.4 ; 1956.22,1413.4 1963.6,1413.4 ; 1963.6,1413.4 1979.94,1413.4
  Top Layer w20: R13.1@1386.85,2203.39 1387.16,2203.69 1416.69,2203.69 v2(1417,2204) ; C9.2@1699.97,1411.72 1700.02,1411.77 1700.02,1445.2 v2(1700.07,1445.25) ; R29.2@1760.6,1286.53 1797.58,1286.53 1807.56,1296.5 v2(1807.56,1341.45)
  Bottom Layer w15: v2(1417,2204) 1449.98,2204 1467.75,2221.76 1737.34,2221.76 v2(1791.4,2275.83)
  Bottom Layer w20: v2(1266.48,1208.19) 1266.48,1339.03 1339.17,1411.72 1669.85,1411.72 1744.24,1486.11 1842.75,1486.11 1876.47,1452.4 1876.47,1414.89 v2@1878,1413.36 ; v2(1807.56,1341.45) 1807.56,1342.91 v2@1878,1413.36 ; v2(1878,1414) v2@1878,1413.36
VDD: C26.2 C31.1 C38.2 P1.31 P2.7 P2.8 U3.11 U3.28 U3.75 | length 7106.3
  Top Layer w8: v2(1089.23,2486.19) 1103.55,2471.87 C31.1@1109.85,2471.87 1110.55,2471.18 1130.78,2471.18 1131.48,2471.87 1153.52,2471.87 U3.11@1206.14,2524.5 ; U3.75@1512.37,3109.11 1545.04,3141.78 1545.04,3153.29 1545.73,3153.99 1545.73,3174.22 C26.2@1545.04,3174.91 ; U3.28@1540.21,2357.47 1585.94,2311.74 1585.94,2300.42 1586.97,2299.39 C38.2@1594.4,2299.39
  Top Layer w20: C38.2@1590.66,2286.12 1594.4,2289.85 1598.29,2289.85 1598.29,2290.48 1599.95,2292.14 1624.26,2292.14 v2(1625.79,2293.67)
  Top Layer w30: v2(1473.78,3169.97) 1479.42,3175.61 1539.66,3175.61 1541.06,3174.22 C26.2@1545.73,3174.22
  Bottom Layer w20: 1450.87,2402.21 1452.86,2400.22 ; v2@1625.2,2294.27 v2(1625.79,2293.67)
  Bottom Layer w25: P1.31@259.1,1231.51 259.84,1231.51 306.87,1184.48 537.7,1184.48 740.89,1387.68 740.89,2171.55
  Bottom Layer w30: 740.89,2171.55 969.57,2400.22 1062.58,2400.22 ; v2(1089.23,2486.19) 1089.23,2426.87 ; 1473.78,3226.59 1473.78,3193.7 ; v2@1625.2,2294.27 1573.52,2294.27 1467.56,2400.22 1452.86,2400.22 1115.87,2400.22 ; v2(1625.79,2293.67) 1832.59,2500.47 1832.59,2834.89 1497.5,3169.97 ; P2.7@2554.28,2431.51 P2.8@2654.28,2431.51 2718.69,2431.51 2736.27,2449.09 2736.27,3413.15 2476.48,3672.93 1584.78,3672.93 1473.78,3561.93 1473.78,3193.7 ; 1062.58,2400.22 1115.87,2400.22 ; 1062.58,2400.22 1089.23,2426.87 ; 1089.23,2426.87 1115.87,2400.22 ; 1473.78,3193.7 1497.5,3169.97 ; 1473.78,3193.7 v2(1473.78,3169.97) 1497.5,3169.97
VDDA: C33.1 R55.1 R57.2 U3.22 | length 1467.4
  Top Layer w10: C33.1@1302.62,2263.48 1302.62,2314.74 U3.22@1359.26,2371.39
  Top Layer w15: R55.1@1223.59,2203.39 1231.67,2211.47 1254.93,2211.47 1263.72,2220.26 1263.72,2238.56 ; v2(1268.56,2263.48) 1268.56,2259.97 1263.72,2255.12 1263.72,2238.56 ; C33.1@1284.72,2265.04 1284.72,2263.48 1284.72,2259.56 1278.6,2253.45 1263.72,2238.56
  Top Layer w30: v2(830.29,1598.57) v2@831.46,1599.73 ; R57.2@855.01,1612.66 v2(831.46,1636.21) 831.46,1612.66 v2@831.46,1599.73 ; R57.2@863.04,1614.12 863.04,1613.14 859.74,1609.83 841.56,1609.83 v2@831.46,1599.73 ; v2(1268.56,2263.48) 1284.72,2263.48 C33.1@1302.62,2263.48
  Bottom Layer w15: 830.08,2024.45 830.29,2024.67 830.73,2025.1
  Bottom Layer w30: v2(830.29,1598.57) 830.29,2024.67 830.29,2143.62 987.63,2300.96 1231.09,2300.96 v2(1268.56,2263.48)
VIO: C19.1 C37.2 P1.33 P1.35 P1.36 R21.2 R57.1 S8.1 U3.50 U3.100 | length 6924.3
  Top Layer w7: U3.50@1846.44,2663.69 1894.09,2616.04 C37.2@1919.21,2616.04
  Top Layer w8: C19.1@812.9,2746.36 898.83,2746.36 943.85,2791.37 1050.35,2791.37 1066.68,2775.05 U3.100@1066.95,2775.05 ; C19.1@825.05,2751.51 826.26,2752.72 894.4,2752.72 938.48,2796.81 1045.19,2796.81 U3.100@1066.95,2775.05 ; 1263.38,2775.74 1242.49,2754.84 1087.15,2754.84 U3.100@1066.95,2775.05 ; 1603.12,2702.46 1860.87,2702.46 1867.28,2696.06 ; C37.2@1921.21,2616.04 1920.69,2616.56 C37.2@1920.69,2629.6 ; U3.100@1066.95,2775.05 1067.22,2775.05 1084.11,2758.16 1236.27,2758.16 1259.45,2781.34 ; 1259.45,2781.34 1265.05,2775.74 1525.58,2775.74 1605.26,2696.06 1613.52,2696.06 ; 1259.45,2781.34 1528.24,2781.34 1613.52,2696.06 ; 1613.52,2696.06 1856.51,2696.06 ; 1856.51,2696.06 1867.28,2696.06 ; 1856.51,2696.06 1913.17,2639.4 1913.17,2631.33 1914.89,2629.6 C37.2@1920.69,2629.6 ; 1867.28,2696.06 1920.69,2642.64 C37.2@1920.69,2629.6
  Top Layer w15: R57.1@927.67,1617.2 966.67,1617.2 1013.95,1569.92 1194.67,1569.92 1203.45,1578.71 1203.45,1606.81 R21.2@1210.77,1614.12
  Top Layer w30: P1.33@259.1,1131.51 P1.35@259.1,1031.51 P1.36@359.1,1031.51 603.76,1031.51 685.74,1113.49 v2(685.74,1544.44) 685.52,1544.66 v2(685.52,1577.39) ; v2@685.63,1577.28 765.66,1657.31 818.01,1709.66 906.1,1709.66 923.67,1692.09 R57.1@923.67,1614.12 ; S8.1@711.58,158.82 713.56,156.84 v2(759.57,156.84) ; v2(718.89,2801) 804.33,2801 821.92,2783.41 821.92,2755.8 C19.1@825.05,2752.67
  Bottom Layer w30: P1.36@359.1,1031.51 505.87,1031.51 759.57,777.82 v2(759.57,156.84) ; v2(685.74,1544.44) 685.74,1577.17 v2(685.52,1577.39) 685.52,2767.63 v2(718.89,2801) 719.11,2801.22 v2(752.43,2801.22)
VREF+: P1.24 R55.2 U3.21 | length 1475.6
  Top Layer w8: P1.24@359.1,1631.51 481.09,1631.51 707.78,1858.2 707.78,1989.87 745.16,2027.25 1126.35,2027.25 1149.05,2027.25 1193.23,2071.42 1193.23,2234.64 1222.61,2264.02 1231.53,2264.02 1231.53,2271.5 U3.21@1345.34,2385.3
VREF-: P1.23 R54.2 U3.20 | length 1618.9
  Top Layer w8: P1.23@259.1,1631.51 305.24,1677.65 508.85,1677.65 686.08,1854.88 686.08,1989.73 736.6,2040.25 1143.67,2040.25 1180.23,2076.81 1180.23,2236.49 R54.2@1152.7,2264.02 ; R54.2@1151.71,2264.02 R54.2@1152.7,2264.02 ; U3.20@1331.42,2399.22 1223.52,2291.33 1180.01,2291.33 R54.2@1152.7,2264.02
X32KI: C11.2 R56.1 U3.8 Y1.1 | length 560.1
  Top Layer w8: R56.1@752.92,2532.57 807.79,2532.57 812.79,2527.57 Y1.1@812.79,2520.25 ; C11.2@866.28,2619.12 864.95,2619.12 849.66,2603.82 849.66,2545.13 Y1.1@838.79,2534.25 840.31,2534.25 906.72,2467.85 975.19,2467.85 1051.6,2544.25 1142.38,2544.25 U3.8@1164.39,2566.26
X32KO: C12.2 R59.1 U3.9 Y1.2 | length 605.2
  Top Layer w8: R59.1@752.92,2464.16 752.92,2463.18 767.22,2448.87 768.21,2448.87 781.25,2435.83 Y1.2@838.79,2435.83 ; Y1.2@815.82,2430.57 Y1.2@850.16,2430.57 ; Y1.2@818.79,2421.83 816.2,2419.24 Y1.2@836.2,2419.24 ; C12.2@866.28,2367.29 865.45,2367.29 850.16,2382.58 Y1.2@850.16,2430.57 ; U3.9@1178.3,2552.34 1156.22,2530.25 1062.29,2530.25 962.6,2430.57 Y1.2@850.16,2430.57
XI: C15.2 U3.12 Y2.1 | length 433.2
  Top Layer w8: C15.2@858.28,2305.51 858.28,2306.5 872.59,2320.8 873.08,2320.8 887.79,2335.51 926.69,2335.51 Y2.1@941.43,2350.26 ; Y2.1@949.93,2363.68 976.9,2390.65 1100.13,2390.65 U3.12@1220.06,2510.58
XI_25M: C4.2 U1.31 X1.1 | length 305.2
  Top Layer w8: C4.2@1118.64,1100.31 1126.46,1108.13 X1.1@1195.81,1108.13 1195.81,1113.05 1239.25,1156.49 1263.68,1156.49 1345.83,1238.64 1363.35,1238.64 U1.31@1363.54,1238.83
XO: C16.2 U3.13 Y2.3 | length 506.1
  Top Layer w8: C16.2@858.28,2242.28 858.28,2241.29 872.59,2226.99 873.57,2226.99 880.28,2220.28 969.98,2220.28 991.78,2242.09 1004.43,2254.72 Y2.3@1004.43,2263.64 ; Y2.3@1002.7,2265.37 U3.13@1233.98,2496.66
XO_25M: C3.2 U1.32 X1.3 | length 327
  Top Layer w8: C3.2@1256.04,945.26 1258.8,948.02 1258.8,1026.44 1320.58,1088.22 1320.58,1190.88 1348.66,1218.95 1363.35,1218.95 U1.32@1363.54,1219.15
pads on no net: ?.0 P4. P4.7 P5.A8 P5.B8 S2.0 S2.3 U1.12 U1.13 U1.18 U1.19 U1.27 U1.28 U3.0 U3.15 U3.17 U3.18 U3.23 U3.26 U3.35 U3.36 U3.47 U3.73 U3.95 U4.2@94.99,3517.62

## Polygon pours and split planes (outlines as drawn)
GND on Bottom Layer "GND" (hatched Horizontal grid 8 track 8, remove dead copper, pour order 0): 0,0 0,3937.01 118.11,3937.01 2913.39,3937.01 2913.39,0
GND on Top Layer "GND" (hatched Horizontal grid 8 track 8, remove dead copper, pour order 2): 2913.38,3937.01 2913.38,0 0,0 0,3937.01

## Keep-outs
Keep-Out Layer:
  lines w10: 0,118.11 ccw(c118.11,118.11) 118.11,0 2795.28,0 ccw(c2795.28,118.11) 2913.39,118.11 2913.39,3818.9 ccw(c2795.28,3818.9) 2795.28,3937.01 118.11,3937.01 ccw(c118.11,3818.9) 0,3818.9 0,118.11

## Other copper
Bottom Layer:
  rectangle net GND: 1387.37,1211.11 1532.58,1347.51

## Silkscreen, mask and mechanical layers (free items; w line width, h text height)
Top Overlay:
  text "HS" at 833.23,3230.15 h100
  text "FS" at 1919.31,3230.15 h100
  text "ON" at 39.2,3219.94 h35 r270
  text "OFF" at 39.2,3122.34 h35 r270
  text "SWCK" at 2350.79,2718.51 h35
  text "TXD" at 2743.28,2718.51 h35
  text "PC10" at 49.94,2714.08 h35
  text "PC12" at 462.86,2714.79 h35
  text "SWIO" at 2362.87,2618.24 h35
  text "RXD" at 2741.45,2618.24 h35
  text "PD1" at 485.02,2614.6 h35
  text "PD0" at 64.61,2613.89 h35
  text "GND" at 2370.96,2517.96 h35
  text "GND" at 2739.61,2517.96 h35
  text "PD3" at 477.52,2514.4 h35
  text "PD2" at 64.61,2513.69 h35
  text "VDD" at 2372.79,2417.69 h35
  text "VDD" at 2741.45,2417.69 h35
  text "PD5" at 477.52,2414.21 h35
  text "PD4" at 63.77,2413.5 h35
  text "5V" at 2386.7,2317.41 h35
  text "5V" at 2755.36,2317.41 h35
  text "PD7" at 477.52,2314.01 h35
  text "PD6" at 65.44,2313.3 h35
  text "GND" at 2370.96,2217.14 h35
  text "GND" at 2739.61,2217.14 h35
  text "PB6" at 65.44,2213.1 h35
  text "PB7" at 477.52,2213.82 h35
  text "PB13" at 1432.81,2145.76 h35 r270
  text "PB11" at 1333.17,2134.1 h35 r270
  text "3V3" at 1133.9,2116.6 h35 r270
  text "PA2" at 1233.53,2116.6 h35 r270
  text "PC4" at 1532.45,2116.6 h35 r270
  text "GND" at 1731.73,2116.6 h35 r270
  text "GND" at 2370.96,2116.86 h35
  text "GND" at 2739.61,2116.86 h35
  text "PE1" at 486.85,2113.62 h35
  text "PE0" at 66.44,2112.91 h35
  text "PA1" at 1632.09,2104.94 h35 r270
  text "GND" at 2370.96,2016.59 h35
  text "GND" at 2739.61,2016.59 h35
  text "GND" at 62.77,2010.21 h35
  text "GND" at 475.69,2010.92 h35
  text "GND" at 2370.96,1916.31 h35
  text "GND" at 2739.61,1916.31 h35
  text "PC15" at 462.86,1911.23 h35
  text "PC14" at 49.11,1910.52 h35
  text "PA11" at 2365.62,1816.04 h35
  text "PA12" at 2726.78,1816.04 h35
  text "GND" at 475.69,1811.53 h35
  text "GND" at 62.77,1810.82 h35
  text "3V3" at 1133.9,1788.97 h35 r270
  text "PB14" at 1233.53,1788.97 h35 r270
  text "PC1" at 1333.17,1788.97 h35 r270
  text "PA7" at 1432.81,1788.97 h35 r270
  text "PC5" at 1532.45,1788.97 h35 r270
  text "PB12" at 1632.09,1788.97 h35 r270
  text "GND" at 1731.73,1788.97 h35 r270
  text "PC7" at 2370.96,1715.76 h35
  text "GND" at 2739.61,1715.76 h35
  text "NRST" at 48.11,1711.12 h35
  text "GND" at 475.69,1711.84 h35
  text "PD15" at 2359.96,1615.49 h35
  text "PC6" at 2740.45,1615.49 h35
  text "VREF+" at 447.61,1612.14 h35
  text "VREF-" at 34.7,1611.43 h35
  text "PD13" at 2359.96,1515.22 h35
  text "PD14" at 2727.78,1515.22 h35
  text "GND" at 475.69,1512.45 h35
  text "PVIN" at 60.94,1511.73 h35
  text "PD11" at 2367.46,1414.94 h35
  text "PD12" at 2728.62,1414.94 h35
  text "GND" at 62.77,1412.04 h35
  text "GND" at 475.69,1412.75 h35
  text "PD9" at 2373.62,1314.67 h35
  text "PD10" at 2728.62,1314.67 h35
  text "3V3" at 477.52,1313.05 h35
  text "VBAT" at 47.19,1312.34 h35
  text "PE15" at 2361.79,1214.39 h35
  text "PD8" at 2741.45,1214.39 h35
  text "3V3" at 477.52,1213.36 h35
  text "VDD" at 64.61,1212.65 h35
  text "PE13" at 2361.79,1114.12 h35
  text "PE14" at 2729.62,1114.12 h35
  text "3V3" at 477.52,1113.66 h35
  text "VIO" at 74.85,1112.95 h35
  text "VIO" at 74.85,1013.25 h35
  text "VIO" at 487.77,1013.97 h35
  text "PE11" at 2369.29,1013.84 h35
  text "PE12" at 2730.45,1013.84 h35
  text "BOOT1" at 452.03,914.27 h35
  text "BOOT0" at 31.61,913.56 h35
  text "PE9" at 2375.45,913.57 h35
  text "PE10" at 2730.45,913.57 h35
  text "GND" at 475.69,814.57 h35
  text "GND" at 62.77,813.86 h35
  text "PE7" at 2374.62,813.29 h35
  text "PE8" at 2743.28,813.29 h35
  text "CH32F207&V307V-R3-2v0" at 1863.51,46.69 h40
Top Solder:
  drawing of 3656 lines, arcs and shapes, not listed
  text "http://wch.cn" at 2111.35,258 h98.43
Mechanical 1:
  lines w10: 2795.28,3937.01 cw(c2795.28,3818.9) 2913.39,3818.9 2913.39,118.06 ; 2795.54,3937.01 118.11,3937.01 ccw(c118.11,3818.9) 0,3818.9 0,118.11 ccw(c118.11,118.11) 118.11,0 2795.28,0 ccw(c2795.28,118.11) 2913.39,118.11